# EAGLE board analog (EAGLE 4.16)
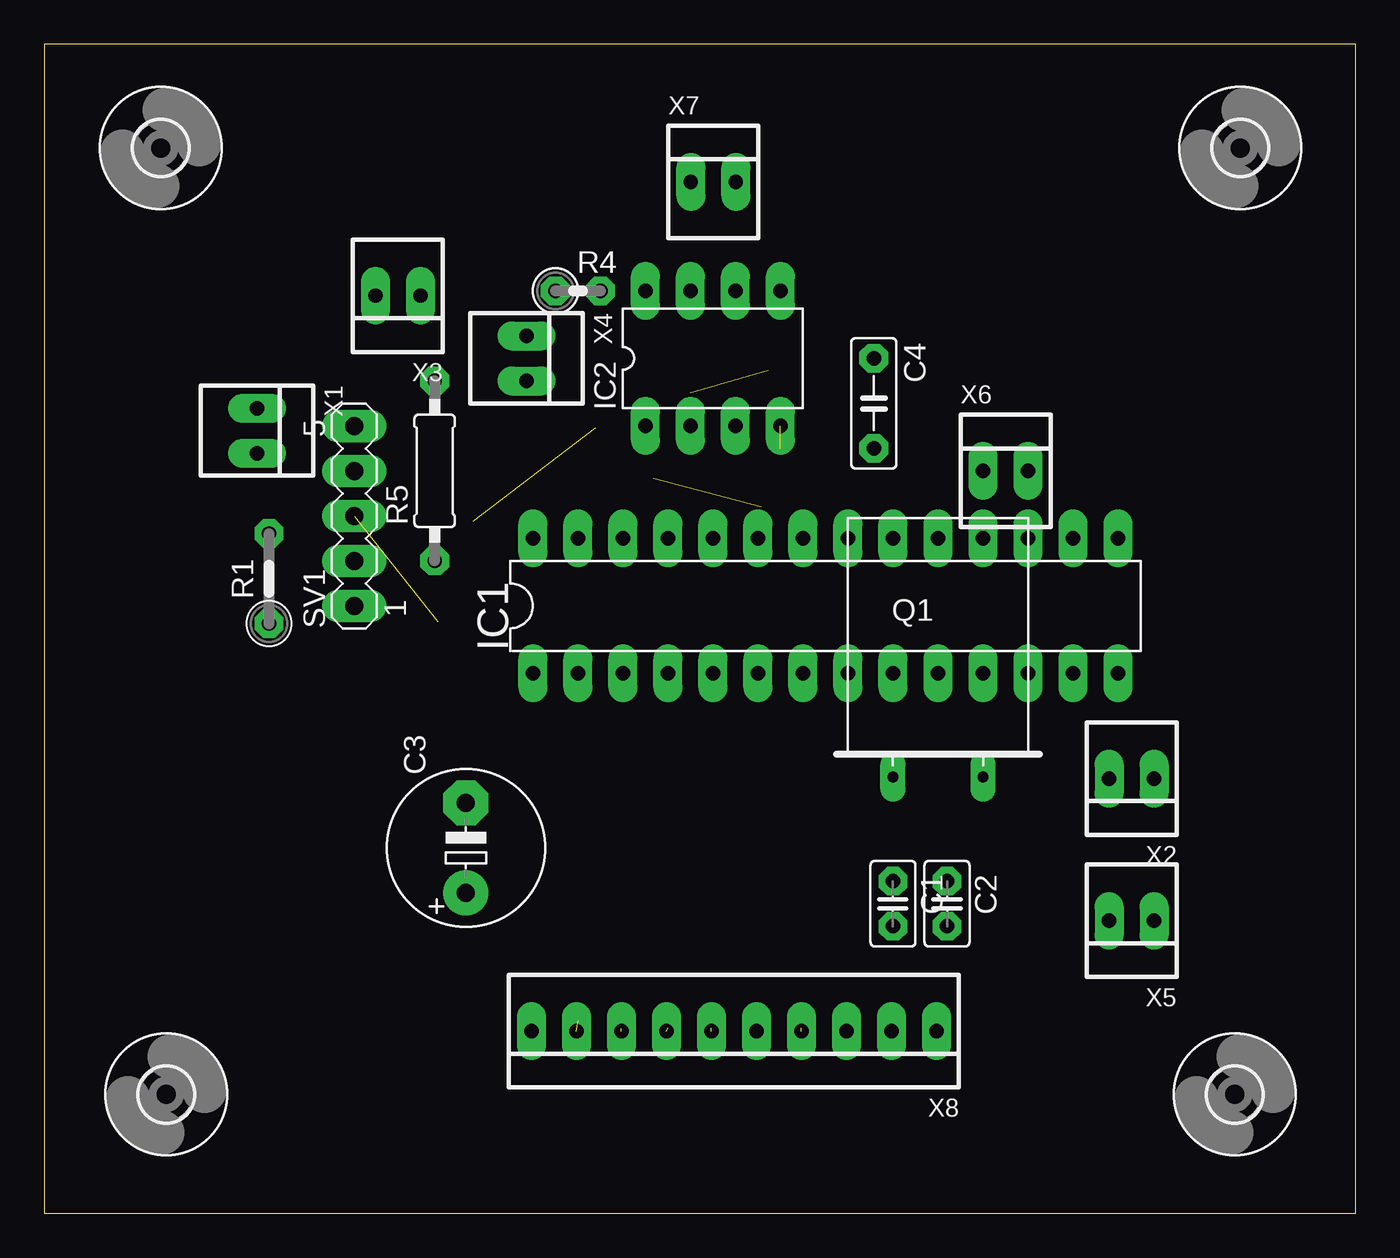
[diagram p0: board, top side]
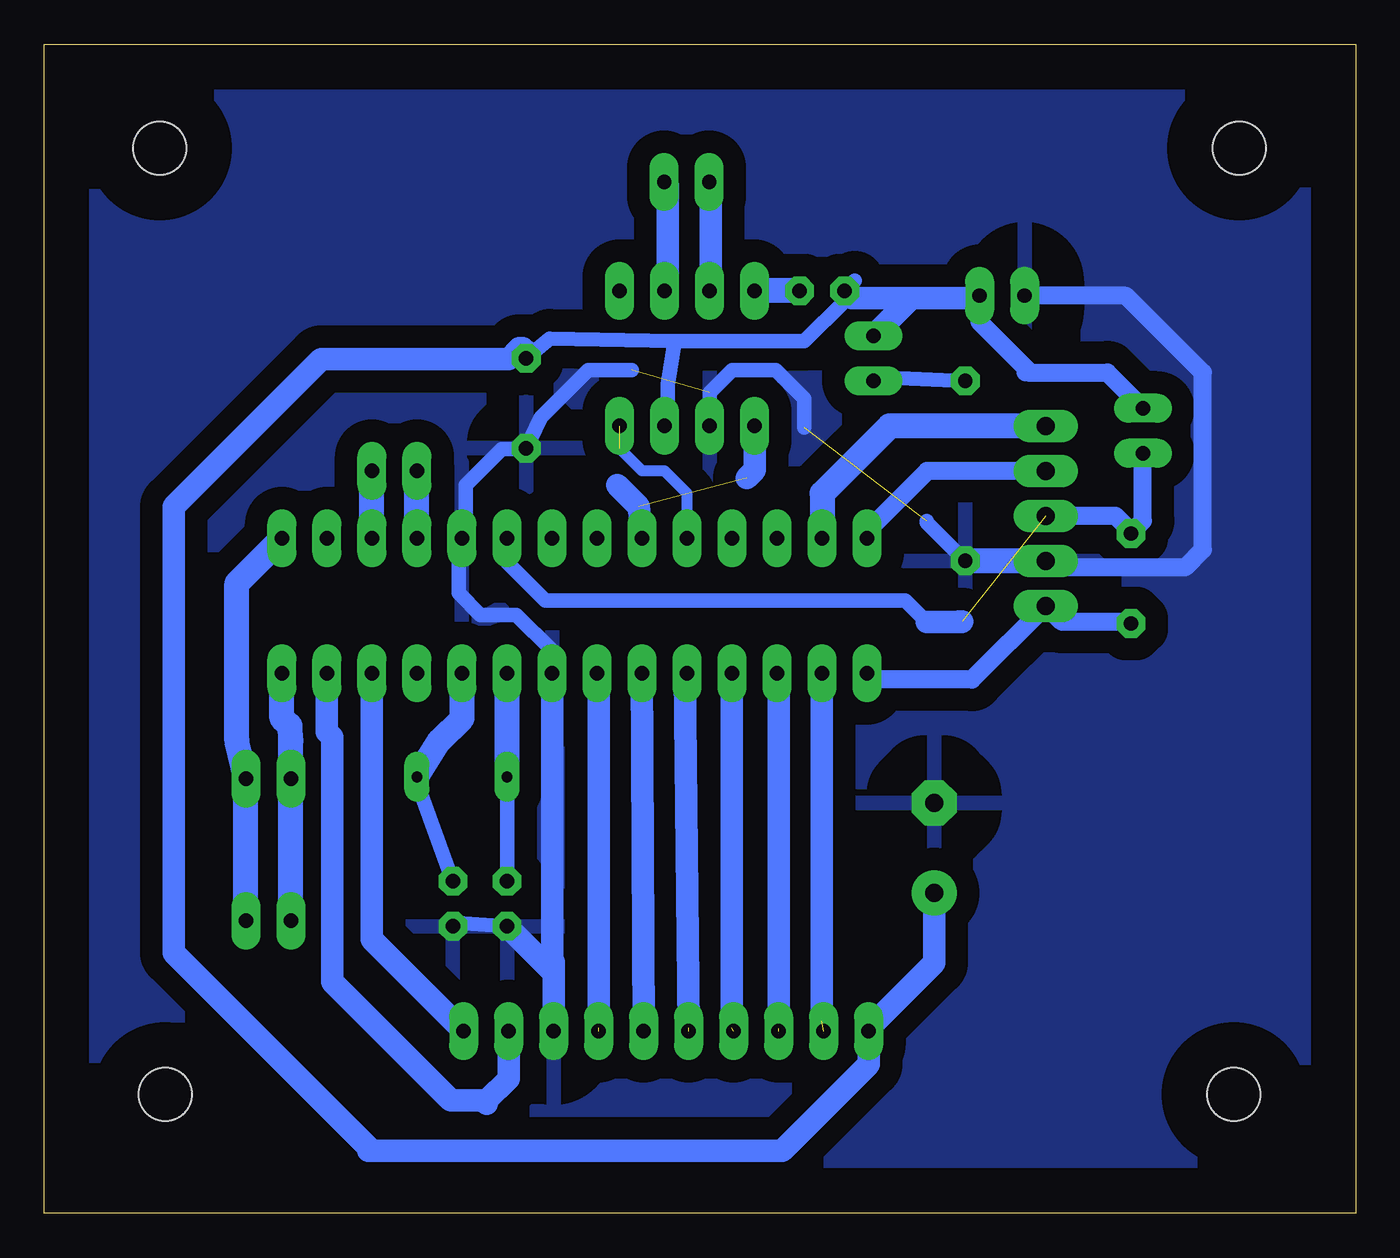
[diagram p1: board, bottom side, seen from below]

Size 74 x 66 mm. Coordinates in mm from the lower left corner, seen from the top.
Outline: 0,0 74,0 74,66 0,66 0,0
Copper layers (1*16): Top 0.035mm / dielectric 1.5mm / Bottom 0.035mm
Design rules "mio2": minimum track width 24mil, minimum drill 24mil, track to track 50mil, track to pad 50mil, pad to pad 50mil, via to via 50mil, smd to smd 50mil, copper to edge 100mil, drill to drill 100mil, minimum pad ring 16mil, minimum via ring 16mil, stop-mask expansion 4mil, vias tented up to drill 0mil, thermal gap 100mil

## Footprints (pad centres in the part's own frame; a part is rotated, then mirrored left to right if it is on the bottom)
C2.5-2 = drill 0.813 pad 1.6 octagon: 1 -1.27,0; 2 1.27,0
E5-8,5 = drill 1.016 pad 2.54 round: + -2.54,0 | drill 1.016 pad 2.54 octagon: - 2.54,0
C050-025X075 = drill 0.813 octagon: 1 -2.54,0; 2 2.54,0
3,0 = hole 3: 0,0
DIL28-3 = drill 0.813 long: 1 -16.51,-3.81; 2 -13.97,-3.81; 3 -11.43,-3.81; 4 -8.89,-3.81; 5 -6.35,-3.81; 6 -3.81,-3.81; 7 -1.27,-3.81; 8 1.27,-3.81; 9 3.81,-3.81; 10 6.35,-3.81; 11 8.89,-3.81; 12 11.43,-3.81; 13 13.97,-3.81; 14 16.51,-3.81; 15 16.51,3.81; 16 13.97,3.81; 17 11.43,3.81; 18 8.89,3.81; 19 6.35,3.81; 20 3.81,3.81; 21 1.27,3.81; 22 -1.27,3.81; 23 -3.81,3.81; 24 -6.35,3.81; 25 -8.89,3.81; 26 -11.43,3.81; 27 -13.97,3.81; 28 -16.51,3.81
DIL08 = drill 0.813 long: 1 -3.81,-3.81; 2 -1.27,-3.81; 3 1.27,-3.81; 4 3.81,-3.81; 5 3.81,3.81; 6 1.27,3.81; 7 -1.27,3.81; 8 -3.81,3.81
Q = drill 0.61 long: 1 -2.54,-7.62; 2 2.54,-7.62
0207/5V = drill 0.813 octagon: 1 -2.54,0; 2 2.54,0
0207/2V = drill 0.813 octagon: 1 -1.27,0; 2 1.27,0
0207/10 = drill 0.813 octagon: 1 -5.08,0; 2 5.08,0
MA05-1 = drill 1.016 long: 1 -5.08,0; 2 -2.54,0; 3 0,0; 4 2.54,0; 5 5.08,0
22-23-2021 = drill 0.813 long: 1 -1.27,0; 2 1.27,0
22-23-2101 = drill 0.813 long: 1 -11.43,0; 2 -8.89,0; 3 -6.35,0; 4 -3.81,0; 5 -1.27,0; 6 1.27,0; 7 3.81,0; 8 6.35,0; 9 8.89,0; 10 11.43,0

## Placement (x,y rotation side)
C1  [C2.5-2]  47.89,17.49 270 top
C2  [C2.5-2]  50.94,17.49 270 top
C3  [E5-8,5]  23.79,20.64 90 top
C4  [C050-025X075]  46.81,45.73 270 top
H1  MOUNT-HOLE3.0  [3,0]  6.88,6.72 0 top
H2  MOUNT-HOLE3.0  [3,0]  67.48,60.14 0 top
H3  MOUNT-HOLE3.0  [3,0]  6.57,60.14 0 top
H4  MOUNT-HOLE3.0  [3,0]  67.18,6.72 0 top
IC1  PIC18F2480-I/SP  [DIL28-3]  44.08,34.3 0 top
IC2  PCA82C250  [DIL08]  37.73,48.27 0 top
Q1  [Q]  50.43,32.27 0 top
R1  [0207/5V]  12.68,35.84 90 top
R4  [0207/2V]  30.11,52.08 0 top
R5  [0207/10]  22.03,41.92 90 top
SV1  [MA05-1]  17.49,39.38 90 top
X1  22-23-2021  [22-23-2021]  12,44.19 270 top
X2  22-23-2021  [22-23-2021]  61.35,24.55 180 top
X3  22-23-2021  [22-23-2021]  19.95,51.81 180 top
X4  22-23-2021  [22-23-2021]  27.21,48.27 270 top
X5  22-23-2021  [22-23-2021]  61.35,16.52 180 top
X6  22-23-2021  [22-23-2021]  54.24,41.92 0 top
X7  22-23-2021  [22-23-2021]  37.75,58.23 0 top
X8  22-23-2101  [22-23-2101]  38.91,10.29 180 top

## Library data of the parts
C1 C2 = capacitor-wima
C3 C4 R1 R4 R5 = rcl
H1-H4 = holes
IC1 = microchip
IC2 = micro-philips
Q1 = special
SV1 = con-lstb
X1-X8 = con-molex

## Nets
GND: C1.2 C2.2 C3.- C4.2 IC1.8 IC1.19 IC2.2 R5.1 SV1.2 X3.2 X8.3
N$1: IC1.1 R1.1 SV1.1
N$2: IC1.14 X2.2 X5.2
N$3: IC1.15 X2.1 X5.1
N$4: R5.2 X4.2
N$5: IC1.27 SV1.5
N$6: IC1.2 X8.9
N$7: C2.1 IC1.10 Q1.2
N$8: C1.1 IC1.9 Q1.1
N$9: IC1.3 X8.8
N$10: IC1.4 X8.7
N$11: IC1.5 X8.6
N$12: IC1.6 X8.5
N$13: IC1.7 X8.4
N$14: IC1.23 IC2.1
N$15: IC1.20 R1.2 SV1.3 X1.2
N$16: IC1.17 X6.2
N$17: IC1.18 X6.1
N$18: IC1.13 X8.2
N$19: IC1.24 IC2.4
N$20: IC2.6 X7.2
N$21: IC2.7 X7.1
N$22: IC2.8 R4.2
N$23: IC1.28 SV1.4
N$24: IC1.12 X8.1
VCC: C3.+ C4.1 IC2.3 R4.1 X1.1 X3.1 X4.1 X8.10

## Tracks (layer width: path | path; a pad name or v marks a point on that pad's centre or on a via)
GND  (2 unrouted)
  Bottom 0.813: IC2.2 36.46,46.33 35.17,47.61 32.74,47.61 31.11,45.99 31.11,44.36 | R5.1 24.2,39.01 24.2,39.08 | IC1.8 45.35,31.78 47.37,33.8 49.4,33.8 50.62,35.01 50.62,37.86 50.37,38.11 | 50.37,38.11 50.21,38.27 50.21,41.11 48.18,43.14 46.86,43.14 C4.2 45.99,44.92 43.3,47.61 40.86,47.61 | 50.37,38.11 IC1.19 | 18.51,51.68 18.64,51.81 X3.2 | 50.94,16.03 C2.2 | C1.2 51.12,16.42 50.94,16.03 | 50.94,16.03 51.02,16.12
  Bottom 1.016: X3.2 12.97,51.81 8.63,47.47 8.63,37.47 9.63,36.47 17.63,36.47 17.49,36.61 SV1.2
  Bottom 1.27: C1.2 45.47,13.8 | 45.47,13.8 45.39,13.72 | 45.35,14.3 45.35,13.91 45.47,13.8 | 45.35,14.3 IC1.8 | 45.35,14.3 45.37,14.3 45.26,14.2 X8.3
  Bottom 1.422: SV1.2 R5.1
  pour Bottom: 0.22,0.88 73.78,0.88 73.78,65.49 -0.18,65.49
N$1
  Bottom 1.016: R1.1 12.77,33.39 16.58,33.39 SV1.1 21.65,30.14 27.86,30.14 27.86,30.2 IC1.1
N$2
  Bottom 1.422: IC1.14 60.59,27.95 60.13,27.54 60.08,26.68 X2.2 X5.2
N$3
  Bottom 1.422: X5.1 X2.1 63.13,26.68 63.13,35.57 IC1.15
N$4
  Bottom 0.813: X4.2 27.05,47.21 R5.2
N$5
  Bottom 1.422: SV1.5 26.3,44.46 30.11,40.65 IC1.27
N$6  (1 unrouted)
  Bottom 1.27: 30.13,30.49 30.13,30.56 | 30.13,30.49 IC1.2 | 30.13,10.88 30.13,30.49
N$7
  Bottom 0.813: Q1.2 52.97,24.53 53.06,24.45 52.97,24.36 C2.1
  Bottom 1.422: IC1.10 50.43,27.95 51.7,26.68 Q1.2
N$8
  Bottom 0.813: Q1.1 47.89,24.56 47.77,24.45 47.89,24.33 C1.1
  Bottom 1.422: Q1.1 IC1.9
N$9  (1 unrouted)
  Bottom 1.27: IC1.3 32.56,30.49 32.56,10.44 32.36,10.68
N$10  (1 unrouted)
  Bottom 1.27: IC1.4 35.21,30.49 35.21,10.48
N$11  (1 unrouted)
  Bottom 1.27: 37.85,30.49 37.85,30.76 | 37.85,30.49 IC1.5 | 37.64,10.48 37.85,30.49
N$12
  Bottom 1.27: IC1.6 40.29,30.97 X8.5
N$13  (1 unrouted)
  Bottom 1.27: 42.72,30.49 42.72,30.56 | 42.72,30.49 IC1.7 | 42.72,10.48 42.72,30.49
N$14  (1 unrouted)
  Bottom 1.27: IC2.1 33.92,41.96 34.36,41.52 | IC1.23 40.46,39.89 41.68,41.11
N$15  (1 unrouted)
  Bottom 0.813: IC1.20 47.89,36.76 45.74,34.61 25.42,34.61 24.2,33.39
  Bottom 1.016: X1.2 12,39.1 12.63,38.47 | 12.63,38.47 12.68,38.42 R1.2 | SV1.3 13.54,39.38 12.63,38.47
  Bottom 1.27: 24.2,33.39 22.22,33.39 22.2,33.4 22.4,33.4
N$16
  Bottom 1.422: IC1.17 X6.2
N$17
  Bottom 1.422: IC1.18 X6.1
N$18
  Bottom 1.27: IC1.13 58.05,27.19 57.76,26.9 57.76,13.08 51.06,6.38 49.23,6.38 49.02,6.18 49.02,6.38 47.8,7.6 47.8,9.83 47.6,10.04 47.8,10.24 X8.2
N$19  (1 unrouted)
  Bottom 0.61: 41.54,43.19 40.27,41.92 39,41.92 37.73,40.65 IC1.24
N$20
  Bottom 1.27: IC2.6 38.83,52.25 38.83,58.05 X7.2
N$21
  Bottom 1.27: X7.1 36.39,58.15 36.39,52.15 IC2.7
N$22
  Bottom 1.422: R4.2 IC2.8
N$23
  Bottom 1.016: IC1.28 27.57,38.41 27.63,38.47 24.18,41.92 SV1.4
N$24
  Bottom 1.27: IC1.12 55.53,30.47 55.53,15.47 X8.1
VCC
  Bottom 0.813: 28.27,52.66 R4.1 28.84,51.51 31.11,49.24 38.43,49.24 | C4.1 45.49,49.39 38.43,49.24 | 38.43,49.24 38.83,46.8 38.83,44.36 38.93,44.46 IC2.3
  Bottom 1.016: X1.1 14.01,47.47 18.51,47.47 | 18.51,47.47 18.63,47.47 | 18.51,47.47 18.51,47.61 21.22,50.32 X3.1
  Bottom 1.27: X3.1 21.35,51.68 25.01,51.68 | X4.1 25.08,51.68 25.01,51.68 | R4.1 28.44,51.68 25.01,51.68 | C4.1 46.81,48.63 46.79,48.64 46.99,48.85 47.2,48.85 47.8,48.24 58.37,48.24 66.7,39.91 66.7,14.71 55.73,3.74 55.73,3.53 32.36,3.53 27.48,8.41 X8.10 27.48,10.44 23.79,14.13 C3.+